# Altium PCB УШЯИ 758725.630-1.PcbDoc
Units mm, origin at the board's own origin, x right, y up, seen from the top; angles counter-clockwise.
Board outline 160 x 90 mm, 2 copper layers (Top Layer, Bottom Layer), stack 1.571 mm thick; 38 components, 12 nets, 83 pads, 18 vias.
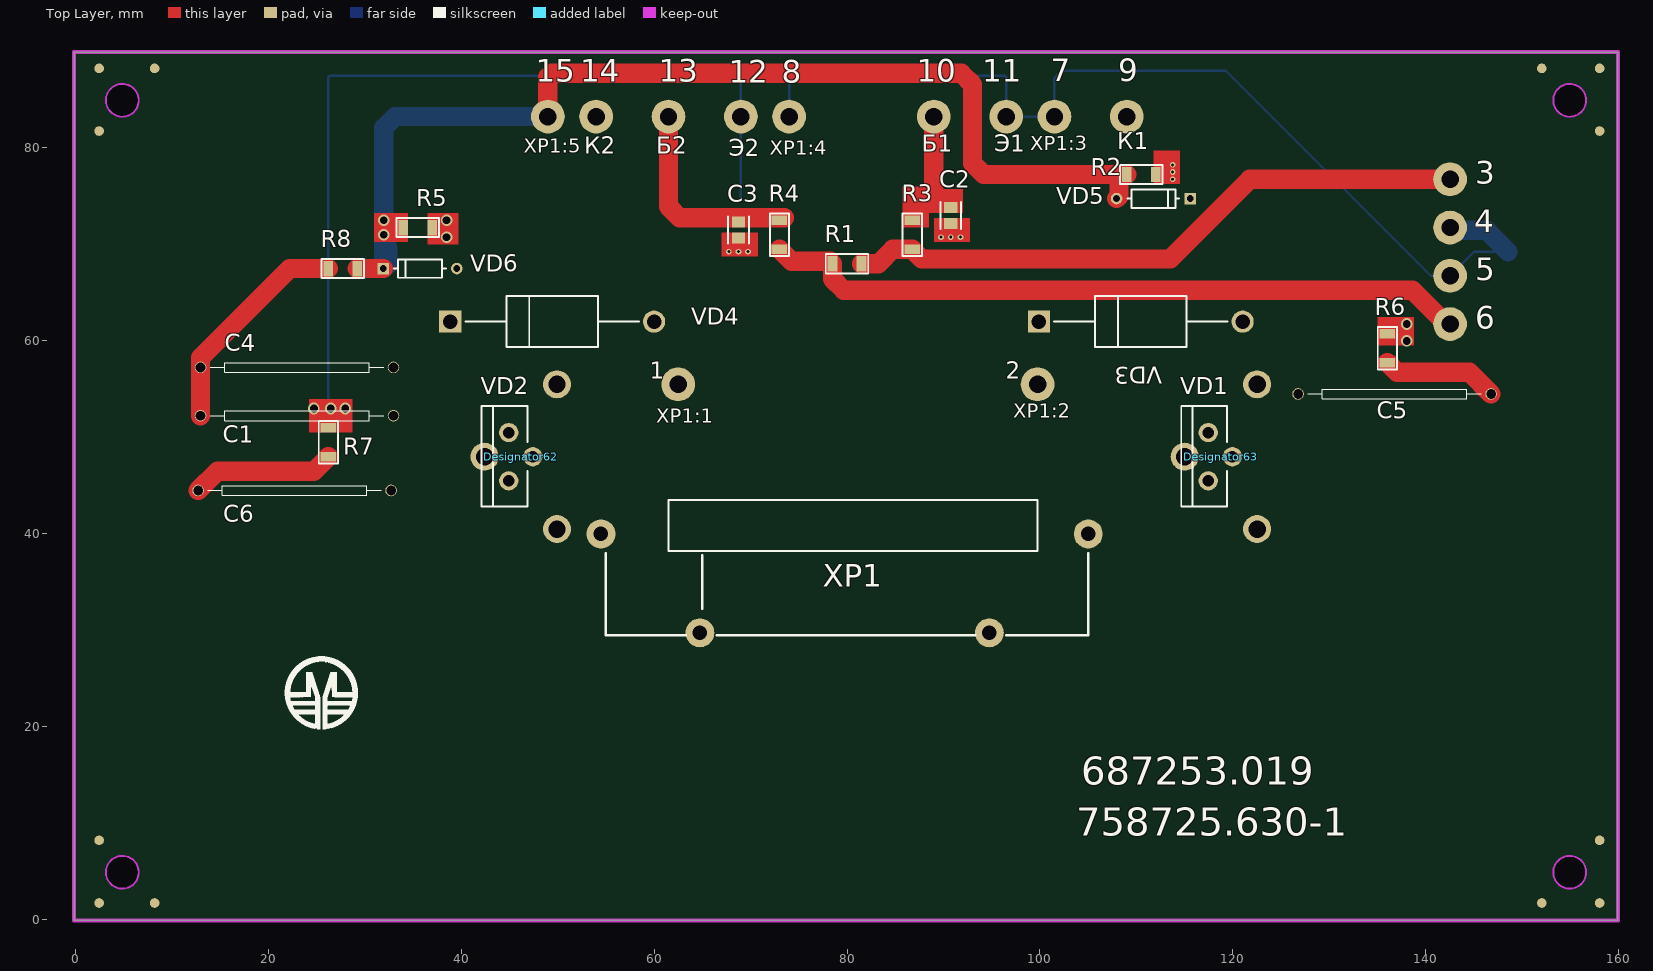
[diagram p0: Top Layer view]
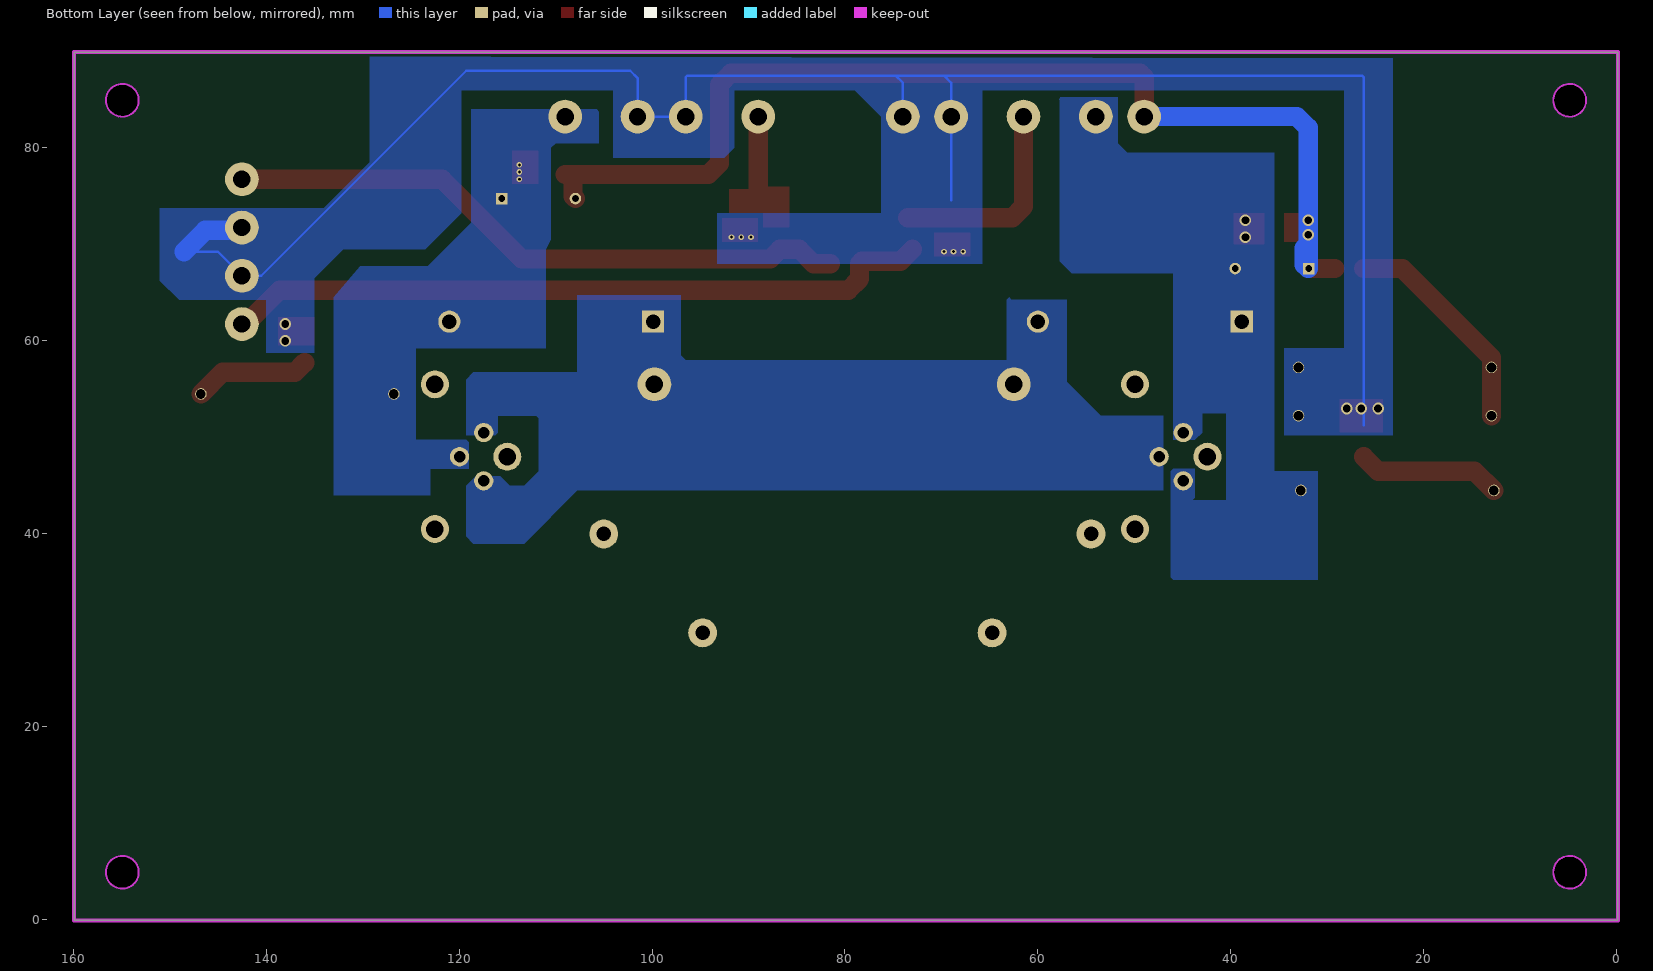
[diagram p1: Bottom Layer view, seen from below]
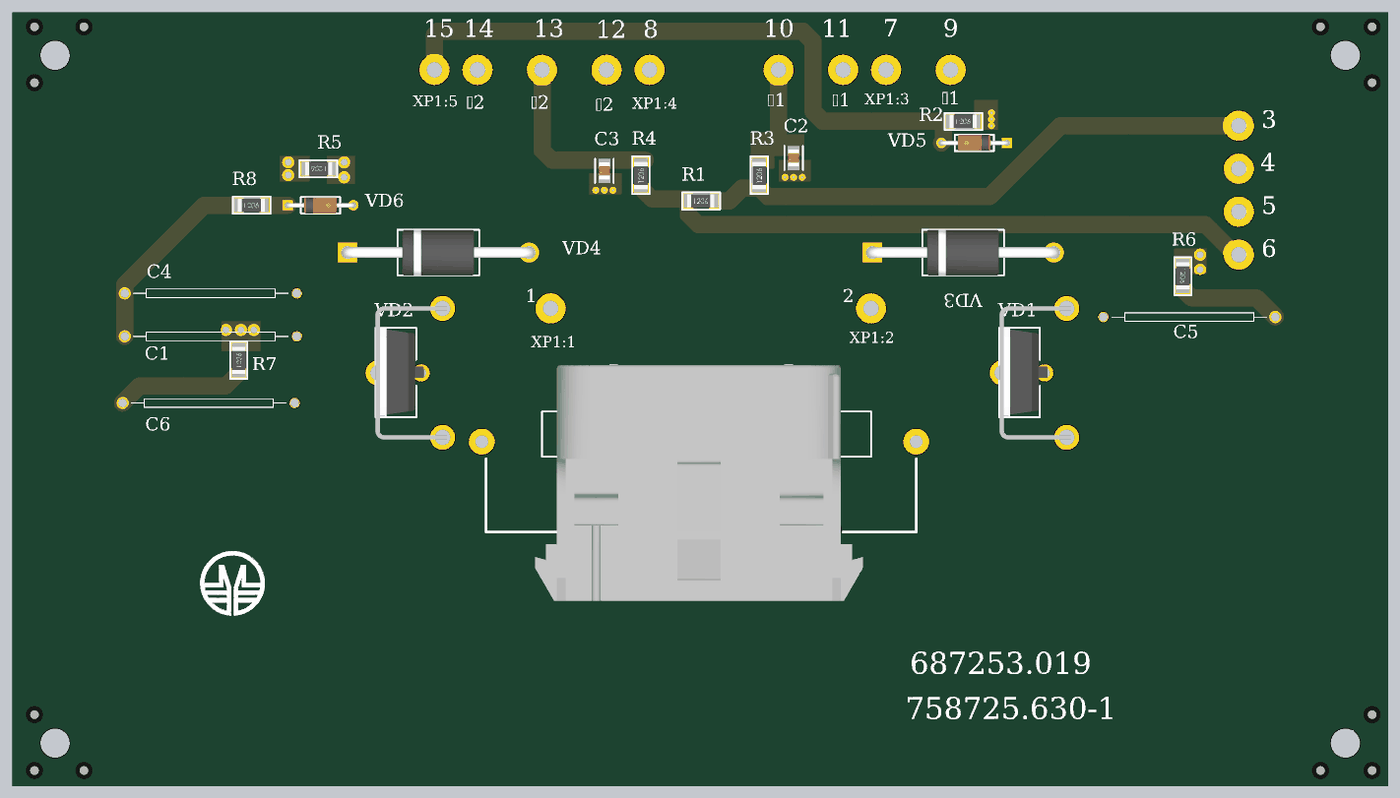
[diagram p2: 3D render of the assembled board from above, using the file's embedded part models]

## Layer stack, top to bottom
Top Solder: solder mask 0.0102, Solder Resist, Dk 3.5
Top Layer: signal copper 0.0356
Dielectric 1: dielectric 1.5, FR-4, Dk 4.8
Bottom Layer: signal copper 0.0356
Bottom Solder: solder mask 0.0102, Solder Resist, Dk 3.5

## Board outline
-0.105,-0.064 159.895,-0.064 159.895,89.936 -0.105,89.936

## Design rules (kind name [scope] priority, off if disabled: settings)
Clearance [All] p1: gap=0.254 ignorepadtopadclearanceinfootprint=FALSE
PolygonConnect PolygonConnect_4 [All vs IsNamedPolygon('NET4_1_L02_P004')] p1: connectstyle=Direct reliefconductorwidth=0.254 reliefentries=4 polygonreliefangle="90 Angle" airgapwidth=0.254
PolygonConnect PolygonConnect_3 [All vs IsNamedPolygon('NET9_1_L02_P003')] p2: connectstyle=Direct reliefconductorwidth=0.254 reliefentries=4 polygonreliefangle="90 Angle" airgapwidth=0.254
PolygonConnect PolygonConnect_2 [All vs IsNamedPolygon('Main_GND')] p3: connectstyle=Direct reliefconductorwidth=0.254 reliefentries=4 polygonreliefangle="90 Angle" airgapwidth=0.254
PolygonConnect PolygonConnect_1 [All vs IsNamedPolygon('NET1_1_L02_P000')] p4: connectstyle=Direct reliefconductorwidth=0.254 reliefentries=4 polygonreliefangle="90 Angle" airgapwidth=0.254
PolygonConnect [All] p5: connectstyle=Relief reliefconductorwidth=0.254 reliefentries=4 polygonreliefangle="90 Angle" airgapwidth=0.254
RoutingVias [All] p1: holewidth=0.711 width=1.27 viastyle="Through Hole" minholewidth=0.711 minwidth=1.27 maxholewidth=0.711 maxwidth=1.27
SolderMaskExpansion [All] p1: expansion=0.102 istentingtop=FALSE
SupplyNets "Schematic Supply Nets" [InNet('GN')] p1: voltage=0.000
Width [All] p1: maxlimit=3 minlimit=0.25 preferedwidth=0.25
30 further rules are at their usual default settings.

## Classes and differential pairs
component class УШЯИ.687253.019Э3_1: 1 2 3 4 5 6 7 8 9 10 11 12 13 14 15 C1 C2 C3 C4 C5 C6 R1 R2 R3 R4 R5 R6 R7 R8 VD1 VD2 VD3 VD4 VD5 VD6 XP1

## Components (designator, comment, footprint, x,y, rotation, side; value= is the part's Value field where it differs from the comment)
1 "OTV18" OTV18#1 62.5,55.5 r90 top
2 "OTV18" OTV18#1 99.75,55.5 r90 top
3 "OTV18" OTV18#2 142.5,78.25 r90 top
4 "OTV18" OTV18#3 142.5,72.5 r90 top
5 "OTV18" OTV18#3 142.5,67.5 r90 top
6 "OTV18" OTV18#3 142.5,62.5 r90 top
7 "OTV18" OTV18#4 118.5,83.25 r90 top
8 "OTV18" OTV18#5 98.25,83.25 r90 top
9 "OTV18" OTV18#6 127.5,83.25 r90 top
10 "OTV18" OTV18#6 107.5,83.25 r90 top
11 "OTV18" OTV18#4 113.5,83.25 r90 top
12 "OTV18" OTV18#7 92.25,83.25 r90 top
13 "OTV18" OTV18#8 86.25,83.25 r90 top
14 "OTV18" OTV18#9 55,83.25 r0 top
15 "OTV18" OTV18#10 47.75,83.25 r90 top
C1 "К73-17-250 В-1 мкФ +-20%" К73-17-А20 13,52.25 r0 top
C2 "GRM2165C2A102JA01D" "GRM216 IPC_B" 90.75,73 r270 top value="1000 пФ"
C3 "GRM2165C2A102JA01D" "GRM216 IPC_B" 68.75,71.5 r270 top value="1000 пФ"
C4 "К73-17-250 В-1 мкФ +-20%" К73-17-А20 13,57.25 r0 top
C5 "К73-17-250 В-0,47 мкФ +-20%" К73-17-А20 146.75,54.5 r180 top
C6 "К73-17-250 В-0,47 мкФ +-20%" К73-17-А20 32.75,44.5 r180 top
Designator62 "Comment" "Стойка 745512.303" 47.442,48 r90 top
Designator63 "Comment" "Стойка 745512.303" 120,48 r90 top
R1 "1206-9,1 кОм+-5%" 1206 80,68 r0 top value="9,1 кОм"
R2 "1206-9,1 кОм+-5%" 1206 110.5,77.25 r0 top value="9,1 кОм"
R3 "1206-240 Ом+-5%" 1206 86.75,71 r90 top value="240 Ом"
R4 "1206-240 Ом+-5%" 1206 73,71 r90 top value="240 Ом"
R5 "1206-9,1 кОм+-5%" 1206 35.5,71.75 r180 top value="9,1 кОм"
R6 "1206-150 Ом+-5%" 1206 136,59.25 r270 top value="150 Ом"
R7 "1206-150 Ом+-5%" 1206 26.25,49.5 r90 top value="150 Ом"
R8 "1206-100 Ом+-5%" 1206 27.75,67.5 r0 top value="100 Ом"
VD1 "1N4007" TO-220(F) 117.442,48 r90 top
VD2 "1N4007" TO-220(F) 44.942,48 r90 top
VD3 "1,5KE68CA" DO-201 110.442,62 r0 top
VD4 "1,5KE68CA" DO-201 49.442,62 r0 top
VD5 "1N4007" DO-35 111.75,74.75 r180 top
VD6 "1N4007" DO-35 35.75,67.5 r0 top
XP1 "MNL-350810-1" 350810-1 79.75,21.5 r180 top locked

## Footprints (in the part's own frame and the unit in brackets; to place one, negate y for a bottom-side part, rotate by r counter-clockwise, add the part's x,y. Pads: shape width x height; smd on the part's side, far side on the other; paste and mask are expansions set on the pad)
1206 [mm] "Resistor SMD"
  rect 1x1.6 smd: 1(-1.5,0) 2(1.5,0)
  silkscreen extent -2.2,-1 2.2,1, body extent -1.65,-0.8 1.55,0.8, height 0.47
350810-1 [mm]
  body extent -19.05,-27.52 19.05,0, height 28.51
DO-35 [mm]
  rect 1.2x1.2 hole 0.7 paste-2539.97 mask+0: 1(-3.813,0)
  round 1.2 hole 0.7 paste-2539.97 mask+0: 2(3.813,0)
  silkscreen extent -2.68,-0.95 2.68,0.95, body extent -4.51,-1.06 4.51,1.06, height 0.25
DO-201 [mm]
  rect 2.3x2.3 hole 1.5 paste-2539.97 mask+0: 1(-10.558,0)
  round 2.3 hole 1.5 paste-2539.97 mask+0: 2(10.558,0)
  silkscreen extent -9.01,-2.65 9.01,2.65, body extent -11.81,-2.75 11.81,2.75, height 0.25
"GRM216 IPC_B" [mm]
  rect 1.158x1.361 smd paste+0 mask+0: 1(-0.827,0) 2(0.827,0)
  silkscreen extent -1.41,-1.08 1.41,1.08, body extent -1.66,-0.93 1.66,0.93, height 0.25
OTV18#1 [mm]
  round 3.5 hole 1.8: 1(0,0)
OTV18#2 [mm]
  round 3.5 hole 1.8: 1(-1.5,0)
OTV18#3 [mm]
  round 3.5 hole 1.8: 1(-0.75,0)
OTV18#4 [mm]
  round 3.5 hole 1.8: 1(0,17)
OTV18#5 [mm]
  round 3.5 hole 1.8: 1(0,24.25)
OTV18#6 [mm]
  round 3.5 hole 1.8: 1(0,18.5)
OTV18#7 [mm]
  round 3.5 hole 1.8: 1(0,23.25)
OTV18#8 [mm]
  round 3.5 hole 1.8: 1(0,24.75)
OTV18#9 [mm]
  round 3.5 hole 1.8: 1(-1,0)
OTV18#10 [mm]
  round 3.5 hole 1.8: 1(0,-1.25)
TO-220(F) [mm] "TO-220 переформованный"
  round 2 hole 1.2: 1(-2.5,0) 2(0,-2.5) 3(2.5,0)
  silkscreen extent -5.15,-1.95 5.25,2.8, body extent -5,-2.8 5.2,2.7, height 23.06
К73-17-А20 [mm]
  round 1.2 hole 1: 1(0,0) 2(20,0)
  silkscreen extent 1,-0.5 19,0.5
"Стойка 745512.303" [mm] "Стойка УШЯИ.745512.303"
  round 2.9 hole 1.8: 2(-7.5,-2.5) 2(0,5) 2(7.5,-2.5)
  body extent -7.75,-3 7.75,5.3, height 25

## Part data
C2 C3: "0805 1000 pF 100 V ±5% Tolerance X7R Multilayer Ceramic Chip Capacitor", Tolerance=5%
VD1 VD2: library part 43CTQ100, "High Performance Schottky Rectifier, 2 x 20 A"
VD3 VD4: library part 1,5KE56CA, "Супрессор 1,5KE68CA"
VD5 VD6: "General Purpose Plastic Rectifier"
R1 R2 R3 R4 R5 R6 R7 R8: ModelPrint=1206

## Free pads (board coordinates)
  round 3.4 hole 3.4 unplated: 0(4.895,4.936) 0(4.895,84.936) 0(154.895,4.936) 0(154.895,84.936)
  round 3 hole 1.5 unplated: 1(54.5,40) 2(64.75,29.75) 3(94.75,29.75) 4(105,40)
  round 1 smd mask+0.5: R1(2.5,1.75) R1(2.5,8.25) R1(2.5,81.75) R1(2.5,88.25) R1(8.25,1.75) R1(8.25,88.25) R1(152,1.75) R1(152,88.25) R1(158,1.75) R1(158,8.25) R1(158,81.75) R1(158,88.25)

## Via types
v1: diameter 0.6, hole 0.3, Top Layer to Bottom Layer, 9 vias
v2: diameter 1.2, hole 0.8, Top Layer to Bottom Layer, 9 vias

## Nets (pads, with @x,y where several pads share a name; then routed paths per layer and width w, separated by ;. In a path a pad name is that pad's centre, name@x,y a point inside that pad or via, vN(x,y) a via of type N, cw(c..) or ccw(c..) an arc to the next point about the centre after c; other vN are vias at no path point)
GN: 15.1 R2.1 R5.2 R8.2 VD5.2 VD6.1 | length 114.8
  Top Layer w0.254: 107.75,76.187 107.75,74.937 VD5.2
  Top Layer w2: R8.2 VD6.1 ; 15.1 49,87.351 49.399,87.75 91.828,87.75 93,86.578 93,78.422 94.172,77.25 108.187,77.25 R2.1 ; VD5.2 108.187,75 108.187,76.437
  Bottom Layer w2: 32,69.938 32,67.5 32.39,67.89 32.39,69.61 32,70 v2@32,71.25 ; v2@32,70.657 32,82.078 33.172,83.25 15.1
  other v2: 32,71 32,72.5
Net1_1: 1.1 2.1 VD1.1 VD1.3 VD2.2 VD3.1 VD4.2
Net3_1: 3.1 R1.2 R3.1 | length 65.5
  Top Layer w2: R1.2 83.25,68 84.75,69.5 R3.1 87.75,68.5 113.5,68.5 121.75,76.75 3.1
Net4_1: 4.1 5.1 7.1 8.1 11.1 12.1 C1.2 C2.2 C3.2 C4.2 R6.1 R7.2 | length 201.6
  Bottom Layer w0.254: 26.25,51.25 26.25,87.351 26.399,87.5 69.75,87.5 ; 69,74.577 12.1 69,86.75 69.75,87.5 ; 8.1 74,86.75 74.75,87.5 ; 148.5,69.25 145,69.25 5.1 140.5,66.75 119.25,88 102.25,88 101.5,87.25 7.1 11.1 96.5,87.351 96.351,87.5 74.75,87.5 ; 69.75,87.5 74.75,87.5
  Bottom Layer w2: 4.1 142.787,71.463 146.287,71.463 148.5,69.25
  other v1: 67.75,69.25 68.75,69.25 69.75,69.25 89.75,70.75 90.75,70.75 91.75,70.75
  other v2: 24.75,53 26.5,53 28,53 138,60 138,61.75
Net6_1: 6.1 R1.1 R4.1 | length 73.6
  Top Layer w2: R4.1 74.25,68.25 78.25,68.25 R1.1 78.5,66.422 79.672,65.25 138.594,65.25 142.094,61.75 6.1
Net9_1: 9.1 C5.2 R2.2 VD1.2 VD3.2 VD5.1 | length 6
  Top Layer w0.254: R2.2 112,76.95 112.2,76.75 v1(113.75,76.75) ; R2.2@112.1,77.65 113.134,78.684 113.316,78.684 v1(113.75,78.25) ; R2.2@112.187,77.563 112.25,77.5 v1(113.75,77.5)
Net10_1: 10.1 C2.1 R3.2 | length 10.2
  Top Layer w0.254: 89,75.476 90.649,73.827 C2.1
  Top Layer w2: 89,75.476 10.1
Net13_1: 13.1 C3.1 R4.2 | length 22.1
  Top Layer w0.254: C3.1 C3.1@68.923,72.5
  Top Layer w2: 13.1 61.5,73.922 62.672,72.75 R4.2@73.5,72.75
Net14_1: 14.1 C6.1 R5.1 VD2.1 VD2.3 VD4.1 VD6.2
  other v2: 38.5,70.75 38.5,72.5
NetC1_1: C1.1 C4.1 R8.1 | length 23.1
  Top Layer w2: C1.1 C4.1 13,58.25 22.25,67.5 R8.1
NetC5_1: C5.1 R6.2 | length 12.1
  Top Layer w2: R6.2 137,56.75 144.5,56.75 C5.1
NetC6_2: C6.2 R7.1 | length 14.9
  Top Layer w2: C6.2 14.75,46.5 24.75,46.5 R7.1
pads on no net: Designator62.2 Designator63.2

## Polygon pours and split planes (outlines as drawn)
Net9_1 on Bottom Layer "NET9_1_L02_P003" (solid, pour order 3): 124.5,59.25 124.5,49.75 119.25,49.75 119,49.5 119,46.75 123,46.75 123,44 133,44 133,64.5 130.25,67.75 123.25,67.75 118.75,72.25 118.75,84 105.75,84 105.5,83.75 105.5,80.5 110,80.5 110.5,80 110.5,70.5 111,69.5 111,59.25
Net4_1 on Bottom Layer "NET4_1_L02_P004" (solid, pour order 4): 34.5,50.25 34.5,59.25 28.25,59.25 28.25,86 65.75,86 65.75,68 93.25,68 93.25,69.5 93.25,73.25 76.25,73.25 76.25,83.25 79,86 91.5,86 91.5,80 92.5,79 104,79 104,86 119.75,86 119.75,73.25 123.5,69.5 132,69.5 135,66.5 135,58.75 140,58.75 140,64.25 149,64.25 151,66.25 151,73.75 134,73.75 129.25,78.5 129.25,89.5 23.25,89.273 23.25,50.25
Net14_1 on Bottom Layer "Main_GND" (solid, pour order 1): 35.5,79.5 35.5,46.5 31,46.5 31,46.25 31,35.25 46,35.25 46.25,35.5 46.25,46.5 46,46.75 43.75,46.75 43.75,43.75 44,43.5 40.5,43.5 40.5,52.5 43,52.5 43,50.5 43.75,49.75 46,49.75 46,67 56.5,67 57.75,68.25 57.75,85 58,85.25 51.75,85.25 51.75,80.5 50.75,79.5
Net1_1 on Bottom Layer "NET1_1_L02_P000" (solid, pour order 0): 107.75,64.75 107.75,56.75 118.5,56.75 119.25,56 119.25,50.25 116.25,50.25 116,50.5 116,52.25 112,52.25 111.75,52 111.75,46.5 113.25,45 114.75,45 115.75,46 118.25,46 119.25,45 119.25,39.75 118.5,39 113.75,39 113.25,39 107.75,44.5 47,44.5 47,52.25 53.5,52.25 57,55.75 57,64.25 62.75,64.25 63,64.5 63.25,64.25 63.25,58 96.5,58 97,58.5 97,64.75

## Keep-outs
Keep-Out Layer:
  circle w0.2: c154.895,84.936 r1.703
  circle w0.2: c154.895,4.936 r1.703
  circle w0.2: c4.895,84.936 r1.703
  circle w0.2: c4.895,4.936 r1.703
  lines w0.4: -0.105,-0.064 -0.105,89.936 159.895,89.936 159.895,-0.064 102.395,-0.064 -0.105,-0.064

## Other copper
Top Layer:
  rectangle net Net4_1: 89,70.25 92.75,72.75
  rectangle net Net4_1: 67,68.75 70.75,71.25
  rectangle net Net4_1: 135,59.5 138.75,62.5
  rectangle net Net4_1: 24.25,50.5 28.75,54
  rectangle net Net14_1: 36.5,70 39.75,73.25
  rectangle net GN: 31,70.25 34.5,73.25
  rectangle net Net10_1: 85.75,71.75 88.5,76
  rectangle net Net10_1: 88,73.25 92,75.75
  rectangle net Net9_1: 111.75,76.25 114.5,79.75

## Silkscreen, mask and mechanical layers (free items; w line width, h text height)
Top Overlay:
  drawing of 11 lines, arcs and shapes, not listed
  text "XP1:3" at 99,79.25 h2.5
  text "К1" at 108,79.25 h3
  text "XP1:5" at 46.5,79 h2.5
  text "Б1" at 87.75,79 h3
  text "Э1" at 95.25,79 h3
  text "К2" at 52.75,78.75 h3
  text "Б2" at 60.25,78.75 h3
  text "XP1:4" at 72,78.75 h2.5
  text "Э2" at 67.75,78.5 h3
  text "XP1:2" at 97.25,51.5 h2.5
  text "XP1:1" at 60.25,51 h2.5
  text "687253.019" at 104.25,13 h5
  text "758725.630-1" at 103.75,7.75 h5
Mechanical 1:
  lines w0.1: -0.105,9.936 9.895,9.936 9.895,-0.064 ; -0.105,79.936 9.895,79.936 9.895,89.936 ; 149.895,-0.064 149.895,9.936 159.895,9.936 ; 149.895,89.936 149.895,79.936 159.895,79.936
Mechanical 3:
  lines w0.15: 1.895,84.936 7.895,84.936 ; 2.395,4.936 7.395,4.936 ; 4.895,2.436 4.895,7.436 ; 4.895,81.936 4.895,87.936 ; 151.895,4.936 157.395,4.936 ; 152.395,84.936 157.395,84.936 ; 154.895,1.936 154.895,7.936 ; 154.895,81.936 154.895,87.436
Drill Drawing:
  circle w0.254: c68.624,102.486 r0.687
  lines w0.254: 67.937,98.708 69.311,98.708 69.311,100.082 67.937,100.082 67.937,98.708 ; 67.937,106.264 69.311,106.264 68.624,104.89 67.937,106.264 ; 67.937,107.981 69.311,107.981 69.311,109.354 67.937,109.354 67.937,107.981 ; 67.937,111.415 68.281,111.415 68.624,111.072 68.968,111.415 69.311,111.415 68.968,111.758 69.311,112.102 68.968,112.102 68.624,112.445 68.281,112.102 67.937,112.102 68.281,111.758 67.937,111.415 ; 67.937,114.506 68.281,114.506 68.281,114.162 68.968,114.162 68.968,114.506 69.311,114.506 69.311,115.193 68.968,115.193 68.968,115.536 68.281,115.536 68.281,115.193 67.937,115.193 67.937,114.506 ; 67.937,117.94 68.624,117.253 69.311,117.94 68.624,118.627 67.937,117.94 ; 67.937,120.344 68.624,120.687 69.311,120.344 68.968,121.031 69.311,121.718 68.624,121.374 67.937,121.718 68.281,121.031 67.937,120.344 ; 67.937,123.435 67.937,123.778 68.281,124.121 67.937,124.465 67.937,124.808 68.281,124.808 68.624,124.465 68.968,124.808 69.311,124.808 69.311,124.465 68.968,124.121 69.311,123.778 69.311,123.435 68.968,123.435 68.624,123.778 68.281,123.435 67.937,123.435 ; 68.212,108.256 69.036,108.256 69.036,109.08 68.212,109.08 68.212,108.256
  lines w0.381: 66.69,97.781 95.775,97.781 ; 66.69,125.598 95.775,125.598 ; 74.031,94.69 74.031,128.689 ; 80.641,94.69 80.641,128.689 ; 88.771,94.69 88.771,128.689 ; 66.69,94.69 95.775,94.69 95.775,128.689 66.69,128.689 66.69,94.69
  text "Symbol" at 68.545,126.525 h1.83
  text "Count" at 74.958,126.525 h1.83
  text "Hole Size" at 81.568,126.525 h1.83
  text "Plated" at 89.698,126.525 h1.83
  text "9" at 74.958,123.435 h1.52
  text "0,300mm" at 81.568,123.435 h1.52
  text "PTH" at 89.698,123.435 h1.52
  text "4" at 74.958,120.344 h1.52
  text "0,700mm" at 81.568,120.344 h1.52
  text "PTH" at 89.698,120.344 h1.52
  text "9" at 74.958,117.253 h1.52
  text "0,800mm" at 81.568,117.253 h1.52
  text "PTH" at 89.698,117.253 h1.52
  text "8" at 74.958,114.162 h1.52
  text "1,000mm" at 81.568,114.162 h1.52
  text "PTH" at 89.698,114.162 h1.52
  text "6" at 74.958,111.072 h1.52
  text "1,200mm" at 81.568,111.072 h1.52
  text "PTH" at 89.698,111.072 h1.52
  text "4" at 74.958,107.981 h1.52
  text "1,500mm" at 81.568,107.981 h1.52
  text "NPTH" at 89.698,107.981 h1.52
  text "4" at 74.958,104.89 h1.52
  text "1,500mm" at 81.568,104.89 h1.52
  text "PTH" at 89.698,104.89 h1.52
  text "21" at 74.958,101.799 h1.52
  text "1,800mm" at 81.568,101.799 h1.52
  text "PTH" at 89.698,101.799 h1.52
  text "4" at 74.958,98.708 h1.52
  text "3,400mm" at 81.568,98.708 h1.52
  text "NPTH" at 89.698,98.708 h1.52
  text "69 Total" at 74.958,95.618 h1.52